# EAGLE board ProjetoEletrico (EAGLE 9.7.0)

Size 219.15 x 86.72 mm. Coordinates in mm from the lower left corner, seen from the top.
Outline: 0,0 219.15,0 219.15,86.72 0,86.72 0,0
Copper layers (1*16): Top 0.035mm / dielectric 1.5mm / Bottom 0.035mm
Design rules "default": minimum track width 6mil, minimum drill 0.35mm, track to track 6mil, track to pad 6mil, pad to pad 6mil, via to via 6mil, smd to smd 6mil, copper to edge 40mil, drill to drill 6mil, minimum pad ring 10mil, minimum via ring 8mil, stop-mask expansion 4mil, vias tented up to drill 0mil, thermal gap 10mil

## Footprints (pad centres in the part's own frame; a part is rotated, then mirrored left to right if it is on the bottom)
DIODE-AXIAL = drill 1: 1 -5.08,0; 2 5.08,0
LEDRD254W60D565H860B = drill 0.981 pad 1.581: 1 -1.27,0; 2 1.27,0
LEDRD254W60D565H860B_G = drill 0.981 pad 1.581: 1 -1.27,0; 2 1.27,0
LEDRD254W60D565H860B_B = drill 0.981 pad 1.581: 1 -1.27,0; 2 1.27,0
KS2E-M-DC5 = drill 0.8: 1 -8.89,-3.81; 4 -1.27,-3.81; 6 3.81,-3.81; 8 8.89,-3.81; 9 8.89,3.81; 11 3.81,3.81; 13 -1.27,3.81; 16 -8.89,3.81
MOTOR = drill 1.118 pad 3.15 octagon: + 2.54,0; - -2.54,0
BATTERY-GENERIC = drill 1.118 pad 3.15 octagon: + 2.54,0; - -2.54,0
RESAD1016W63L850D250B = drill 0.83 pad 1.43: 1 -5.08,0; 2 5.08,0
HA-06-SM065 = drill 1 pad 1.676: 1 -2.54,-2.54; 2 0,2.54; 3 2.54,-2.54
78F01T = drill 0.8: 1 -1.27,-3.81; 2 1.27,-3.81; 3 1.27,3.81; 4 -1.27,3.81
ARDUINO-UNO-R3-SHIELD = drill 1.016 pad 1.88: 3.3V 24.13,-2.54; 5V 24.13,0; A0 24.13,12.7; A1 24.13,15.24; A2 24.13,17.78; A3 24.13,20.32; A4 24.13,22.86; A5 24.13,25.4; AREF -24.13,-13.97; D2 -24.13,20.32; D3 -24.13,17.78; D4 -24.13,15.24; D5 -24.13,12.7; D6 -24.13,10.16; D7 -24.13,7.62; D8 -24.13,3.81; D9 -24.13,1.27; D10 -24.13,-1.27; D11 -24.13,-3.81; D12 -24.13,-6.35; D13 -24.13,-8.89; GND@0 24.13,2.54; GND@1 24.13,5.08; GND@2 -24.13,-11.43; IOREF 24.13,-7.62; NC 24.13,-10.16; RES 24.13,-5.08; RX -24.13,25.4; SCL -24.13,-19.05; SDA -24.13,-16.51; TX -24.13,22.86; VIN 24.13,7.62
TO92 = drill 0.813 octagon: 1 -1.27,0; 2 0,1.905; 3 1.27,0

## Placement (x,y rotation side)
D1  DIODEDIODE-AXIAL  [DIODE-AXIAL]  97.31,68.08 0 top
D2  RED  [LEDRD254W60D565H860B]  120.77,36.04 180 top
D3  GREEN  [LEDRD254W60D565H860B_G]  97.13,35.74 180 top
D4  BLUE  [LEDRD254W60D565H860B_B]  144.04,36.62 180 top
K1  RELAY-DPDT_KS2E  [KS2E-M-DC5]  179.56,34.66 180 top
K2  RELAY-DPDT_KS2E  [KS2E-M-DC5]  179.64,63.08 180 top
K3  RELAY-DPDT_KS2E  [KS2E-M-DC5]  179.79,48.88 180 top
K4  RELAY-DPDT_KS2E  [KS2E-M-DC5]  179.39,20.03 180 top
M1  MOTOR_HDR  [MOTOR]  94.66,75.22 0 top
MPELTIER  MOTOR_HDR  [MOTOR]  146.65,75.17 0 top
MVENTILADOR  MOTOR_HDR  [MOTOR]  120.52,75.25 0 top
P1  BATTERYGENERIC  [BATTERY-GENERIC]  210.89,78.47 180 top
R1  4700  [RESAD1016W63L850D250B]  75.66,42.02 270 top
R2  1000  [RESAD1016W63L850D250B]  151.15,28.22 270 top
RPOT1  500  [HA-06-SM065]  148.69,8.26 0 top
SW1  DPST78F01T  [78F01T]  131.04,11.07 0 top
U1  ARDUINO-UNO-R3-SHIELD  [ARDUINO-UNO-R3-SHIELD]  29.84,38.81 180 top
U2  TMP36GT9Z_TO92  [TO92]  146.23,52.26 0 top
U3  TMP36GT9Z_TO92  [TO92]  120.28,52.22 0 top
U4  TMP36GT9Z_TO92  [TO92]  95.61,52.19 0 top

## Library data of the parts
D1 K1-K4 M1 MPELTIER MVENTILADOR P1 R1 R2 RPOT1 SW1 U1-U4 = Tinkercad
D2 = Tinkercad; CATEGORY: Opto-Electronic; SUB-CATEGORY: LED; VALUE: LED_RED
D3 = Tinkercad; CATEGORY: Opto-Electronic; SUB-CATEGORY: LED; VALUE: LED_GREEN
D4 = Tinkercad; CATEGORY: Opto-Electronic; SUB-CATEGORY: LED; VALUE: LED_BLUE

## Nets
D4_C: D2.2 D3.2 D4.2 R2.1
M1_+: D1.2 K4.9 M1.+
MPELTIER_+: K2.6 MPELTIER.+
MPELTIER_-: K3.6 MPELTIER.-
MVENTILADOR_+: K1.9 MVENTILADOR.+
P1+: K1.13 K2.4 K3.4 K4.13 P1.+
P1-: D1.1 K2.8 K3.8 M1.- MVENTILADOR.- P1.-
U1_5V: R1.2 RPOT1.1 SW1.1 U1.5V U2.3 U3.3 U4.3
U1_A0: RPOT1.2 U1.A0
U1_D2: R1.1 U1.D2 U2.2 U3.2 U4.2
U1_D4: SW1.4 U1.D4
U1_D5: D4.1 U1.D5
U1_D6: D2.1 U1.D6
U1_D7: D3.1 U1.D7
U1_D8: K2.1 U1.D8
U1_D9: K3.1 U1.D9
U1_D10: K1.1 U1.D10
U1_D11: K4.1 U1.D11
U1_GND: K1.16 K2.16 K3.16 K4.16 R2.2 RPOT1.3 U1.GND@0 U1.GND@1 U1.GND@2 U2.1 U3.1 U4.1

## Tracks (layer width: path | path; a pad name or v marks a point on that pad's centre or on a via)
D4_C  (3 unrouted)
M1_+  (2 unrouted)
MPELTIER_+  (1 unrouted)
MPELTIER_-  (1 unrouted)
MVENTILADOR_+  (1 unrouted)
P1+  (4 unrouted)
P1-  (5 unrouted)
U1_5V  (6 unrouted)
U1_A0  (1 unrouted)
U1_D2  (4 unrouted)
U1_D4  (1 unrouted)
U1_D5  (1 unrouted)
U1_D6  (1 unrouted)
U1_D7  (1 unrouted)
U1_D8  (1 unrouted)
U1_D9  (1 unrouted)
U1_D10  (1 unrouted)
U1_D11  (1 unrouted)
U1_GND  (11 unrouted)